# Altium PCB testprint.PcbDoc
Units mm, origin at the board's own origin, x right, y up, seen from the top; angles counter-clockwise.
Board outline 49.95 x 19.98 mm, 3 copper layers (Top Layer, Mid-Layer 2, Bottom Layer); 7 components, 0 nets, 49 pads, 0 vias.
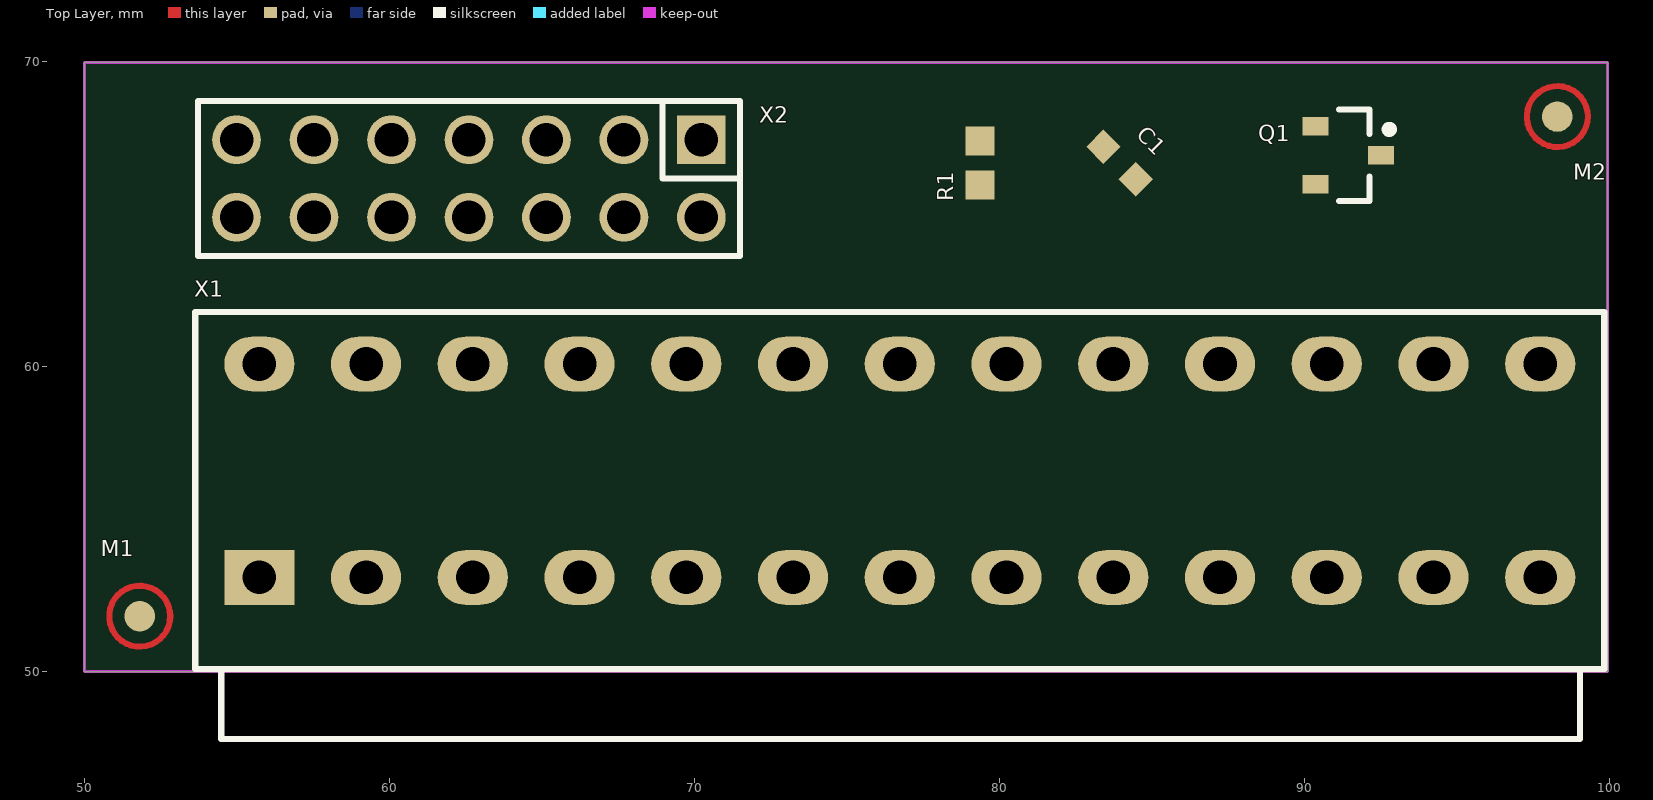
[diagram p0: Top Layer view]
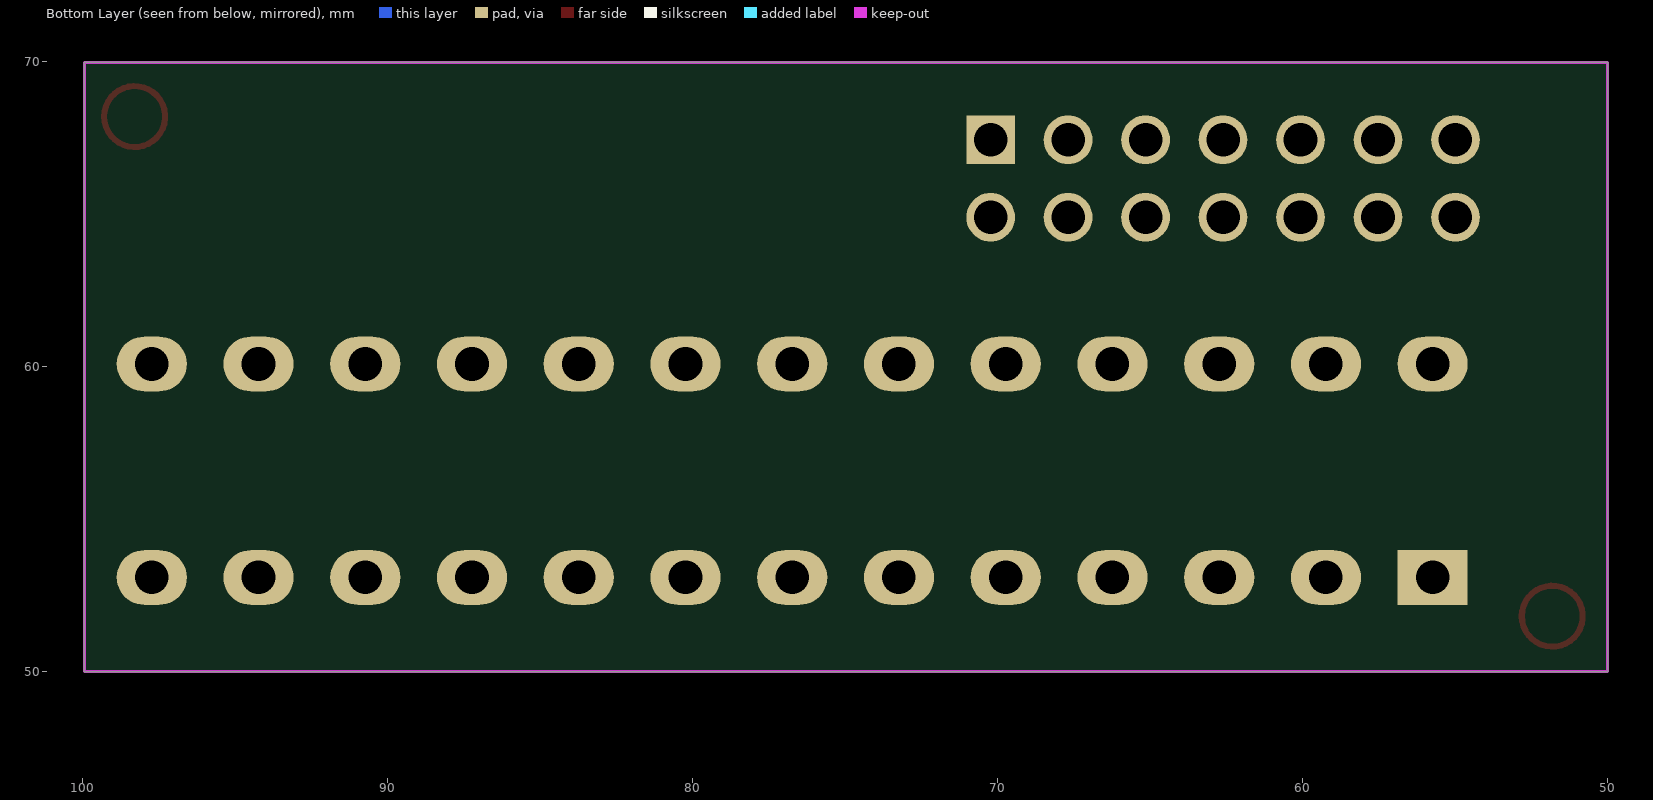
[diagram p1: Bottom Layer view, seen from below]

## Layer stack, top to bottom
Top Solder: solder mask 0.0102, Solder Resist, Dk 3.5
Top Layer: signal copper 0.0356
Dielectric 1: dielectric 0.32, FR-4, Dk 4.8
Mid-Layer 2: signal copper 0.0356
Dielectric2: dielectric 0.32, FR-4, Dk 4.8
Bottom Layer: signal copper 0.0356
Bottom Solder: solder mask 0.0102, Solder Resist, Dk 3.5

## Board outline
50,50 99.949,50 99.949,69.977 50,69.977

## Design rules (kind name [scope] priority, off if disabled: settings)
Clearance [All] p1: gap=0.254 ignorepadtopadclearanceinfootprint=FALSE except(0: Arc-Hole Track-Hole SMDPad-Hole THPad-Hole Via-Hole Fill-Hole Poly-Hole Region-Hole Text-Hole)
PolygonConnect [All] p1: connectstyle=Relief reliefconductorwidth=0.254 reliefentries=4 polygonreliefangle="90 Angle" airgapwidth=0.254
RoutingVias [All] p1: holewidth=0.711 width=1.27 viastyle="Through Hole" minholewidth=0.711 minwidth=1.27 maxholewidth=0.711 maxwidth=1.27
SolderMaskExpansion [All] p1: expansion=0.102
Width [All] p1: maxlimit=0.254 minlimit=0.254 preferedwidth=0.254
30 further rules are at their usual default settings.

## Components (designator, comment, footprint, x,y, rotation, side; value= is the part's Value field where it differs from the comment)
C1 "100nF" "CAP 0603" 83.947,66.675 r315 top (schematic designator C5)
M1 "Marker" PASSER-KREIS 51.816,51.816 r0 top (schematic designator M7)
M2 "Marker" PASSER-KREIS 98.298,68.199 r0 top (schematic designator M7)
Q1 "NUD3160LT1G" SOT23_L 91.44,66.929 r0 top
R1 "150R" "RES 0603" 79.375,66.675 r90 top (schematic designator R2)
X1 "1870380000" 1870380000 55.738,53.086 r0 top (schematic designator J2)
X2 "61301421121" 61301421121 62.611,66.167 r180 top (schematic designator X1)

## Footprints (in the part's own frame and the unit in brackets; to place one, negate y for a bottom-side part, rotate by r counter-clockwise, add the part's x,y. Pads: shape width x height; smd on the part's side, far side on the other; paste and mask are expansions set on the pad)
1870380000 [mm] "Weidmuller, CONN TERM BLK 13PS 3.5MM R/A PCB"
  rect 2.3x1.8 hole 1.1: 1(0,0)
  oval 2.3x1.8 hole 1.1: 1(0,7) 2(3.5,0) 2(3.5,7) 3(7,0) 3(7,7) 4(10.5,0) 4(10.5,7) 5(14,0) 5(14,7) 6(17.5,0) 6(17.5,7) 7(21,0) 7(21,7) 8(24.5,0) 8(24.5,7) 9(28,0) 9(28,7) 10(31.5,0) 10(31.5,7) 11(35,0) 11(35,7) 12(38.5,0) 12(38.5,7) 13(42,0) 13(42,7)
  silkscreen extent -2.1,-5.3 44.1,8.7, body extent -2.1,-5.3 44.1,8.7, height 8.5
61301421121 [mm] "14 pins, dual pin, straight, gold plating"
  rect 1.6x1.6 hole 1.1: 1(-7.62,-1.27)
  round 1.6 hole 1.1: 2(-7.62,1.27) 3(-5.08,-1.27) 4(-5.08,1.27) 5(-2.54,-1.27) 6(-2.54,1.27) 7(0,-1.27) 8(0,1.27) 9(2.54,-1.27) 10(2.54,1.27) 11(5.08,-1.27) 12(5.08,1.27) 13(7.62,-1.27) 14(7.62,1.27)
  silkscreen extent -8.89,-2.54 8.89,2.54, body extent -8.89,-2.54 8.89,2.54, height 8.55
"CAP 0603" [mm] "CAPACITOR SMD 0603"
  rect 0.8x0.8 smd: 1(-0.75,0) 2(0.75,0)
  body extent -0.88,-0.45 0.88,0.45, height 0.9
PASSER-KREIS [mm]
  round 1 smd paste-0.5 mask+0.05: 1(0,0)
  Top Layer circle w0.2: c0,0 r1
  Top Layer pour cut-out: -1.5,1.5 1.5,1.5 1.5,-1.5 -1.5,-1.5
"RES 0603" [mm] "RESISTOR SMD 0603"
  rect 0.95x0.95 smd: 1(-0.725,0) 2(0.725,0)
  body extent -0.8,-0.45 0.8,0.45, height 0.55
SOT23_L [mm] "SOT23, 3-Leads, Body 2.9x1.3mm, Pitch 0.95mm, Lead Span 2.3mm - Reverse Pinning, IPC High Density"
  rect 0.85x0.6 smd: 1(-1.075,0.95) 2(-1.075,-0.95) 3(1.075,0)
  silkscreen extent -0.3,-1.5 1.48,1.5, body extent -0.7,-1.5 0.7,1.5, height 1.1

## Part data
C1: library part GRM188R71C104KA01D, "CAP CER 0.1UF 16V 10% X7R 0603"
M1 M2: library part M
Q1: "IC INDCT LOAD DRVR INDUST SOT23"
R1: library part ERJ-3EKF2201V
X1: "LSF-SMT 3.50/13/90 3.5SN BK"
X2: library part HDR14

## Nets (pads, with @x,y where several pads share a name; then routed paths per layer and width w, separated by ;. In a path a pad name is that pad's centre, name@x,y a point inside that pad or via, vN(x,y) a via of type N, cw(c..) or ccw(c..) an arc to the next point about the centre after c; other vN are vias at no path point)
pads on no net: C1.1 C1.2 M1.1 M2.1 Q1.1 Q1.2 Q1.3 R1.1 R1.2 X1.1 X1.2 X1.3 X1.4 X1.5 X1.6 X1.7 X1.8 X1.9 X1.10 X1.11 X1.12 X1.13 X2.1 X2.2 X2.3 X2.4 X2.5 X2.6 X2.7 X2.8 X2.9 X2.10 X2.11 X2.12 X2.13 X2.14

## Keep-outs
Keep-Out Layer:
  the board outline again, w0.1